# Altium PCB Projet_travelling_detecteur_V3.PcbDoc
Units mil, origin at the board's own origin, x right, y up, seen from the top; angles counter-clockwise.
Board outline 3180 x 1790 mil, 2 copper layers (Top Layer, Bottom Layer); 12 components, 9 nets, 44 pads, 4 vias.
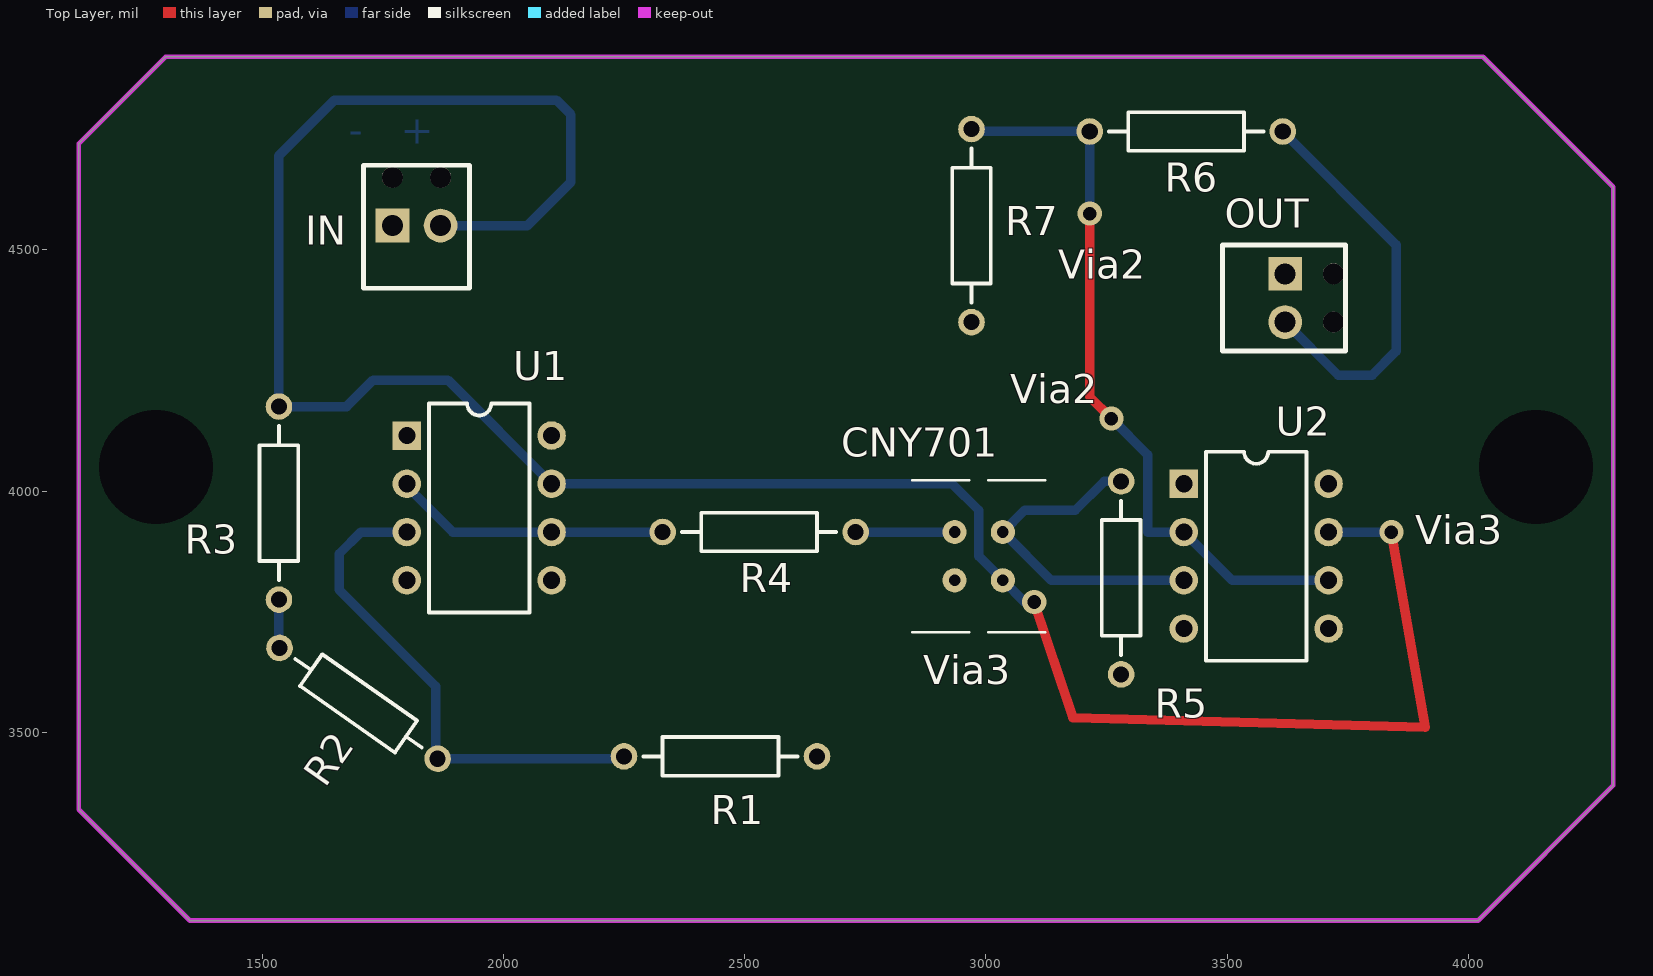
[diagram p0: Top Layer view]
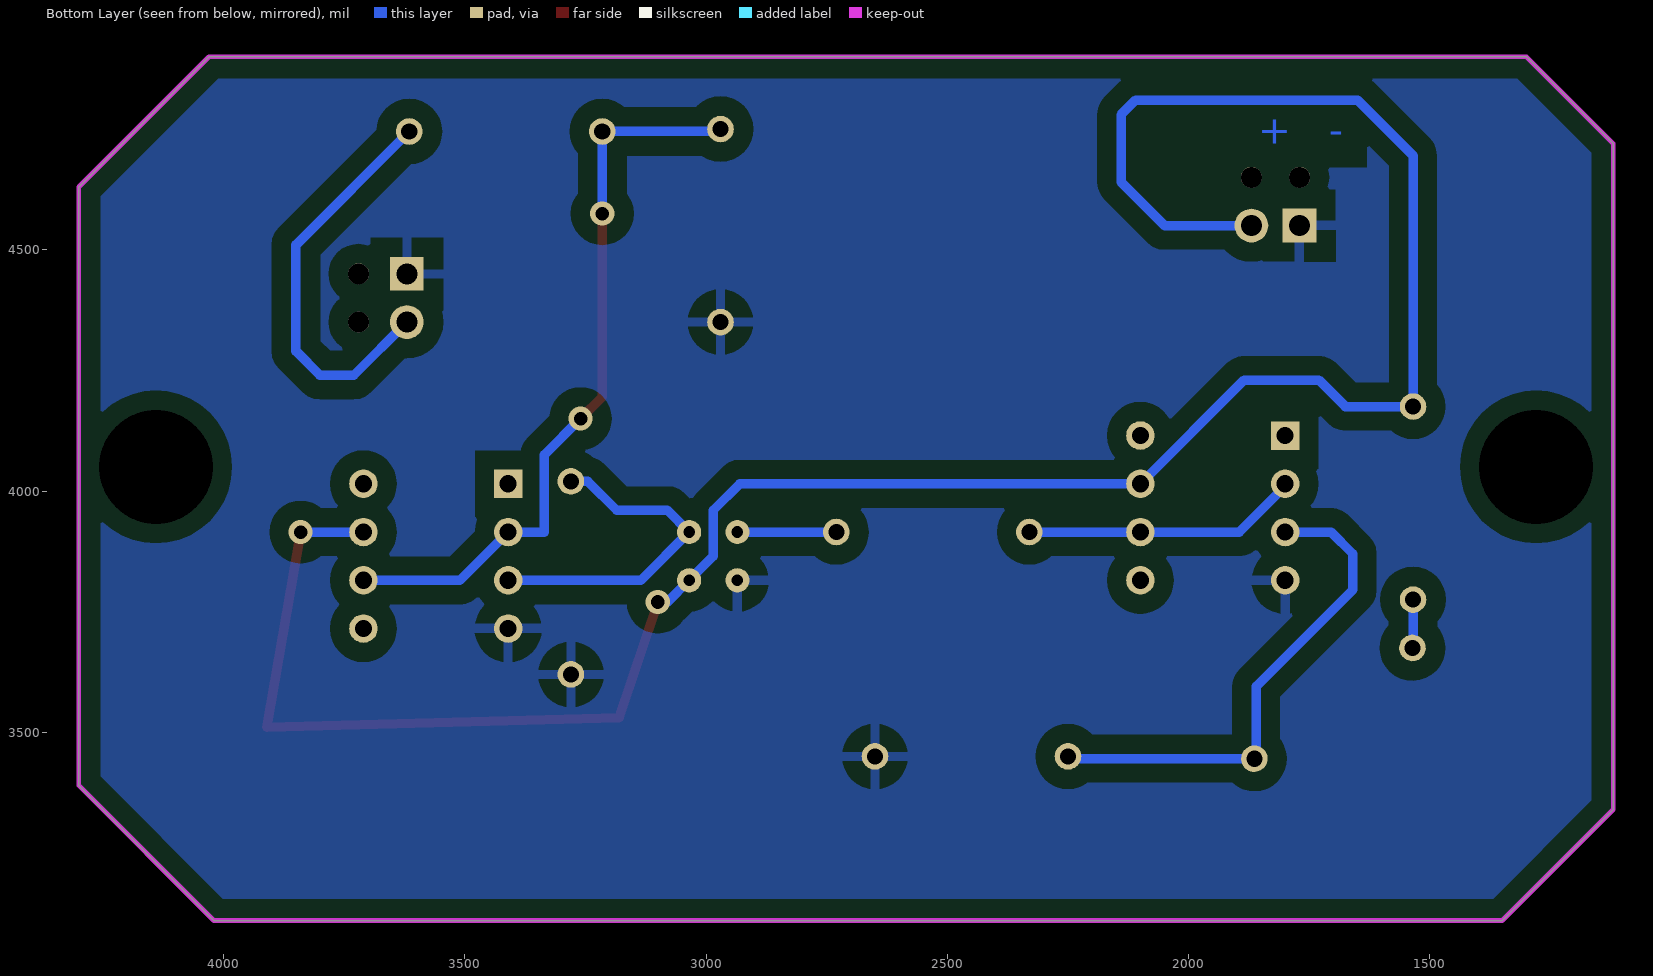
[diagram p1: Bottom Layer view, seen from below]

## Layer stack, top to bottom
Top Solder: solder mask 0.4, Solder Resist, Dk 3.5
Top Layer: signal copper 1.4
Dielectric 1: dielectric 12.6, FR-4, Dk 4.8
Bottom Layer: signal copper 1.4
Bottom Solder: solder mask 0.4, Solder Resist, Dk 3.5

## Board outline
1120,3340 1120,4720 1300,4900 4030,4900 4300,4630 4300,3390 4020,3110 1350,3110

## Design rules (kind name [scope] priority, off if disabled: settings)
Clearance Clearance_1 [All vs InPoly] p1: gap=40 ignorepadtopadclearanceinfootprint=FALSE
Clearance [All] p2: gap=10 ignorepadtopadclearanceinfootprint=FALSE
ComponentClearance [All] p1: gap=0 collisioncheckmode=3 verticalgap=0 showdistances=FALSE
HoleSize [All] p1: absolutevalues=TRUE maxlimit=393.7 minlimit=1 maxpercent=80.000 minpercent=20.000
PolygonConnect [All] p1: connectstyle=Relief reliefconductorwidth=19.68 reliefentries=4 polygonreliefangle="90 Angle" airgapwidth=40
RoutingVias [All] p1: holewidth=28 width=50 viastyle="Through Hole" minholewidth=28 minwidth=50 maxholewidth=28 maxwidth=50
SilkToSolderMaskClearance [IsPad] p1: minsilkscreentomaskgap=0 clearancetoexposedcopper=TRUE
SolderMaskExpansion [All] p1: expansion=4
Width [All] p1: maxlimit=39.37 minlimit=9.84 preferedwidth=19.68 minimp=50.000000 maximp=50.000000 favimp=50.000000
27 further rules are at their usual default settings.

## Components (designator, comment, footprint, x,y, rotation, side; value= is the part's Value field where it differs from the comment)
CNY701 "CNY70" *4_CNY70(Primary) 2985,3865 r0 top
IN "Screw Terminal 2/2.54" MPT_0.5-2-2.54 1770,4550 r0 top
OUT "Screw Terminal 2/2.54" MPT_0.5-2-2.54 3620,4450 r270 top
R1 "Res2" AXIAL-0.4 2450,3450 r180 top value=1K
R2 "Res2" AXIAL-0.4 1700,3560 r145 top value=1K
R3 "Res2" AXIAL-0.4 1535,3975 r90 top value=1K
R4 "Res2" AXIAL-0.4 2530,3915 r0 top value=1K
R5 "Res2" AXIAL-0.4 3280,3820 r270 top value=1K
R6 "Res2" AXIAL-0.4 3415,4745 r0 top value=1K
R7 "Res2" AXIAL-0.4 2970,4550 r90 top value=1K
U1 "TL080" "DIL 8" 1800,4115 r0 top
U2 "TL080" "DIL 8" 3410,4015 r0 top

## Footprints (in the part's own frame and the unit in brackets; to place one, negate y for a bottom-side part, rotate by r counter-clockwise, add the part's x,y. Pads: shape width x height; smd on the part's side, far side on the other; paste and mask are expansions set on the pad)
*4_CNY70(Primary) [mil]
  round 50 hole 24: A(-50,50) C(50,-50) E(50,50) K(-50,-50)
  silkscreen extent -138,-157 138,157
AXIAL-0.4 [mm] "Axial Device, Thru-Hole; 2 Leads; 0.4 in Pin Spacing"
  round 1.4 hole 0.85: 1(-5.08,0) 2(5.08,0)
  silkscreen extent -4.06,-1.02 4.06,1.02
"DIL 8" [mm]
  rect 1.5x1.5 hole 0.9: 1(0,0)
  round 1.5 hole 0.9: 2(0,-2.54) 3(0,-5.08) 4(0,-7.62) 5(7.62,-7.62) 6(7.62,-5.08) 7(7.62,-2.54) 8(7.62,0)
  silkscreen extent 1.16,-9.31 6.46,1.69, body extent -0.13,-9.52 7.75,1.91, height 4.19
MPT_0.5-2-2.54 [mm]
  rect 1.778x1.778 hole 1.1: 0(0,0)
  round 1.778 hole 1.1: 1(2.54,0)
  round 1.1 hole 1.1: 9(0,2.54) 10(2.54,2.54)
  silkscreen extent -1.52,-3.3 4.06,3.17, body extent -1.57,-3.2 3.97,3, height 8.5

## Part data
CNY701: "Reflective Optical Sensor 0.197 _5mm_ PCB Mount", Package="PCB Mount Vishay", Availability=Unavailable, MF=Vishay, MP=CNY70, Price=None, SnapEDA_Link=https://www.snapeda.com/parts/CNY70/Vishay%20Semiconductor%20Opto%20Division/view-part/230090/?ref=snap
IN OUT: "MPT 0.5/ 2 contacts / 2.54 mm", Supplier Part Number 1=3041359, Supplier 1=Farnell
R1 R2 R3 R4 R5 R6 R7: "Resistor", LatestRevisionDate=17-Jul-2002, LatestRevisionNote="Re-released for DXP Platform.", PackageDescription="Axial Device, Thru-Hole; 2 Leads; 0.4 in Pin Spacing", PackageReference=AXIAL-0.4, Published=8-Jun-2000, Publisher="Altium Limited"
U1 U2: "JFET-Input Operational Amplifier", Supplier Part Number 1=TL080CPE4-ND, Code_JEDEC=MO-001-AN, ComponentLink1Description="Manufacturer Link", ComponentLink1URL=http://www.ti.com/, ComponentLink2Description=Datasheet, ComponentLink2URL=http://www-s.ti.com/sc/ds/tl080.pdf, DatasheetVersion=Nov-1988, LatestRevisionDate=04-Mar-2005, LatestRevisionNote="Stylized 3D Model Added.", PackageDescription="DIP; 8 Leads; Row Spacing 7.62 mm; Pitch 2.54 mm", PackageReference=P008, PackageVersion=Jun-1999, Published=16-Jan-2001, Publisher="Altium Limited", Supplier 1=Digi-Key

## Free pads (board coordinates)
  round 0 hole 236.22: 2(1280,4050) 3(4140,4050)

## Via types
v1: diameter 50, hole 28, Top Layer to Bottom Layer, 4 vias

## Nets (pads, with @x,y where several pads share a name; then routed paths per layer and width w, separated by ;. In a path a pad name is that pad's centre, name@x,y a point inside that pad or via, vN(x,y) a via of type N, cw(c..) or ccw(c..) an arc to the next point about the centre after c; other vN are vias at no path point)
NetCNY701_A: CNY701.A R4.2 | length 205
  Bottom Layer w19.68: R4.2 CNY701.A
NetCNY701_C: CNY701.C IN.1 R3.2 U1.7 U2.7 | length 4990.6
  Top Layer w19.68: v1(3100,3770) 3180,3530 3910,3510 v1(3840,3915)
  Bottom Layer w19.68: IN.1 2050,4550 2140,4640 2140,4780 2110,4810 1650,4810 1535,4695 R3.2 1675,4175 1730,4230 1885,4230 U1.7 2930,4015 2985,3960 2985,3865 CNY701.C 3080,3770 v1(3100,3770) ; U2.7 v1(3840,3915)
NetCNY701_E: CNY701.E R5.1 U2.3 | length 704.9
  Bottom Layer w19.68: R5.1 3245,4020 3185,3960 3080,3960 CNY701.E 3135,3815 U2.3
NetCNY701_K: CNY701.K IN.0 OUT.0 R1.1 R5.2 R7.1 U1.4 U2.4
NetR1_2: R1.2 R2.1 U1.3 | length 1055.9
  Bottom Layer w19.68: U1.3 1705,3915 1660,3870 1660,3795 1860,3595 1860,3449.12 R2.1 2245.28,3445.28 R1.2
NetR2_2: R2.2 R3.1 | length 100.8
  Bottom Layer w19.68: R3.1 1535,3675.88 R2.2
NetR4_1: R4.1 U1.2 U1.6 | length 571.4
  Bottom Layer w19.68: U1.2@1795,4015 1895,3915 U1.6@2095,3915 ; U1.6 R4.1
NetR6_1: R6.1 R7.2 U2.2 U2.6 | length 1550.3
  Top Layer w19.68: R6.1@3210,4750 R6.1 ; v1(3215,4575) 3215,4195 v1(3260,4150)
  Bottom Layer w19.68: R7.2 2975,4745 R6.1 v1(3215,4575) ; v1(3260,4150) 3335,4075 3335,3915 U2.2 3510,3815 U2.6
Vs: OUT.1 R6.2 | length 848.6
  Bottom Layer w19.68: R6.2 3850,4510 3850,4290 3800,4240 3730,4240 OUT.1
pads on no net: IN.9 IN.10 OUT.9 OUT.10 U1.1 U1.5 U1.8 U2.1 U2.5 U2.8

## Polygon pours and split planes (outlines as drawn)
NetCNY701_K on Bottom Layer (solid, remove dead copper, pour order 0): 1120,3110 1120,4900 4300,4900 4300,3110

## Keep-outs
Keep-Out Layer:
  the board outline again, w10

## Other copper
Bottom Layer:
  text "-   +" at 1680,4720 h60

## Silkscreen, mask and mechanical layers (free items; w line width, h text height)
Top Overlay:
  text "Via2" at 3150,4440 h60
  text "Via2" at 3050,4181.54 h60
  text "Via3" at 3890,3890 h60
  text "Via3" at 2870,3600 h60